# Altium PCB IKIU_UAV.PcbDoc
Units mm, origin at the board's own origin, x right, y up, seen from the top; angles counter-clockwise.
Board outline 69.98 x 70 mm, 2 copper layers (Top Layer, Bottom Layer); 42 components, 52 nets, 190 pads, 0 vias.
Unrouted connection lines stored in the file: 62.
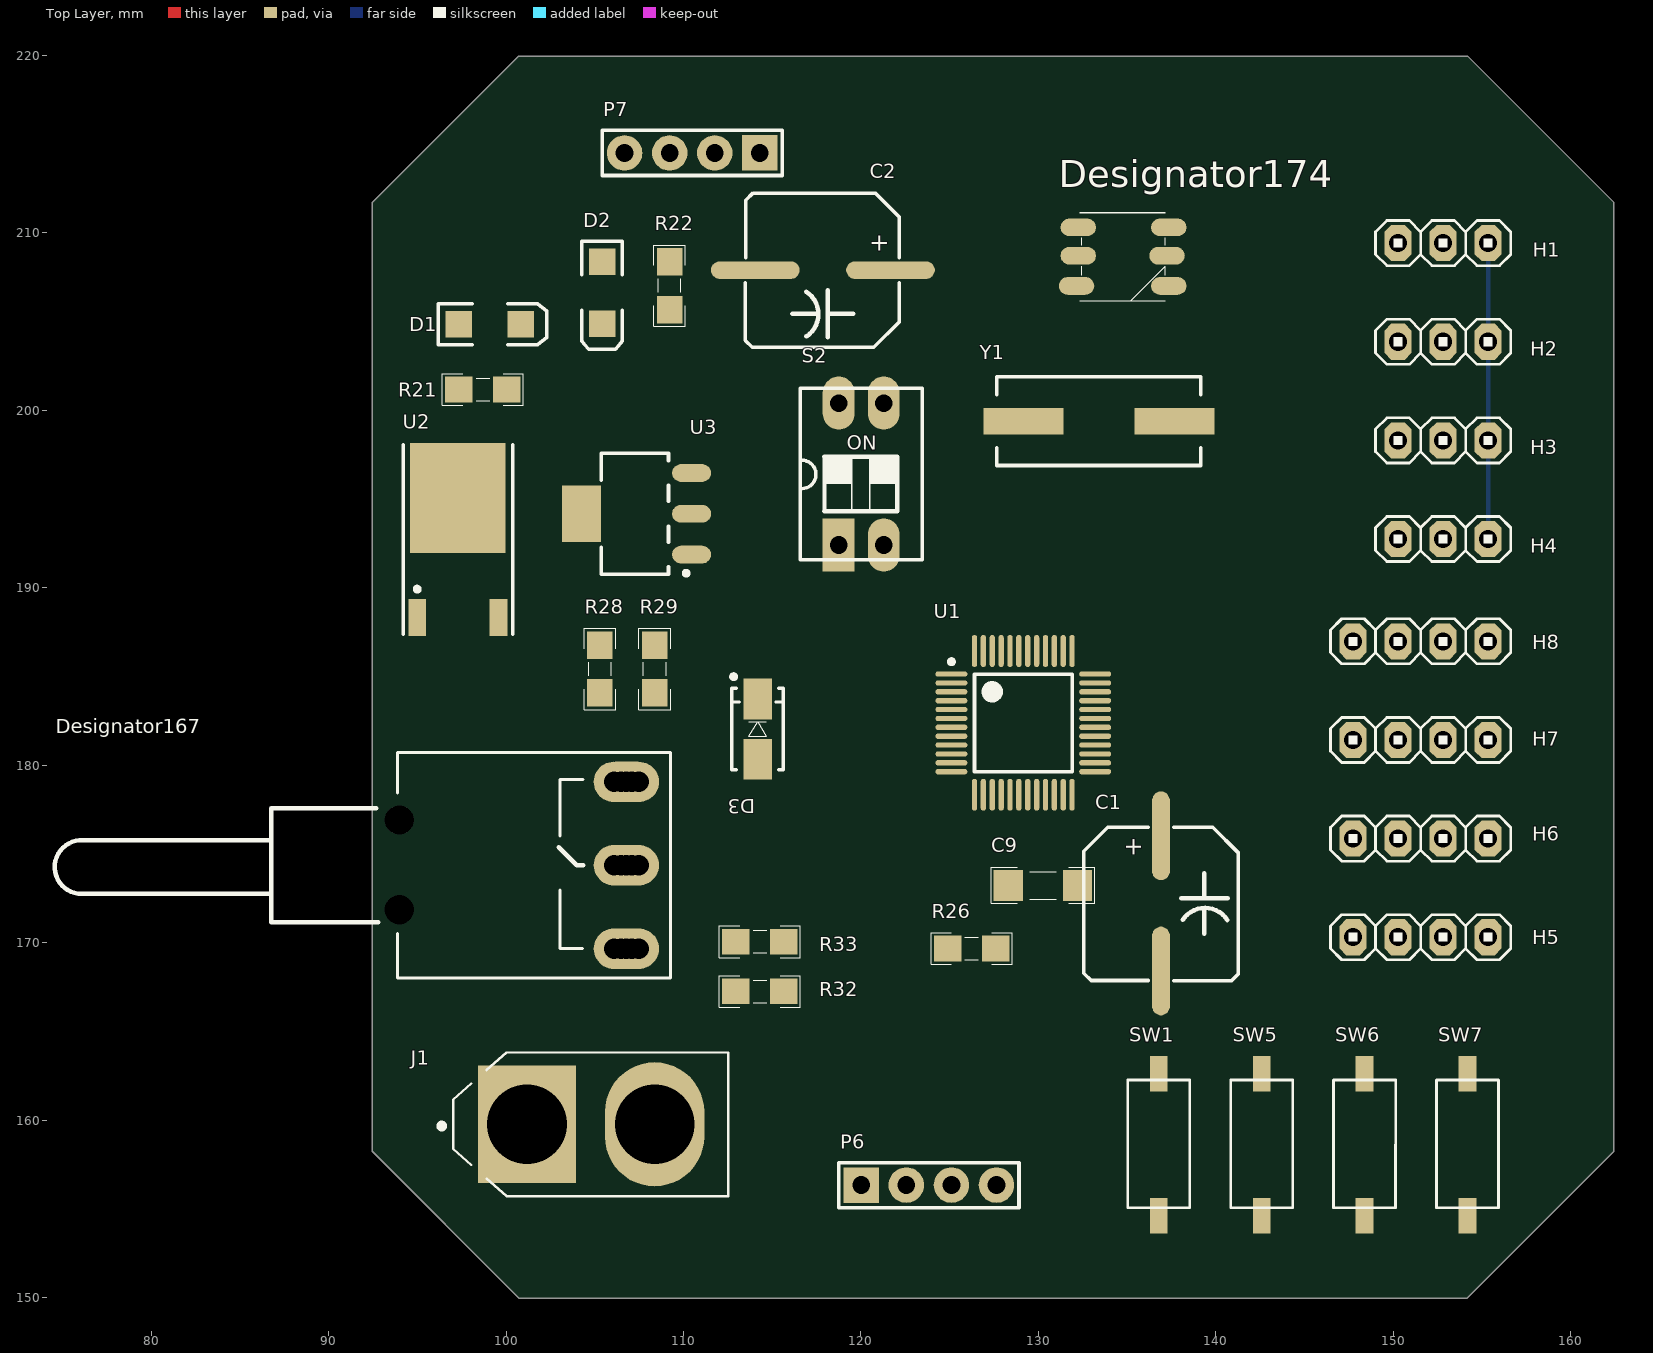
[diagram p0: Top Layer view]
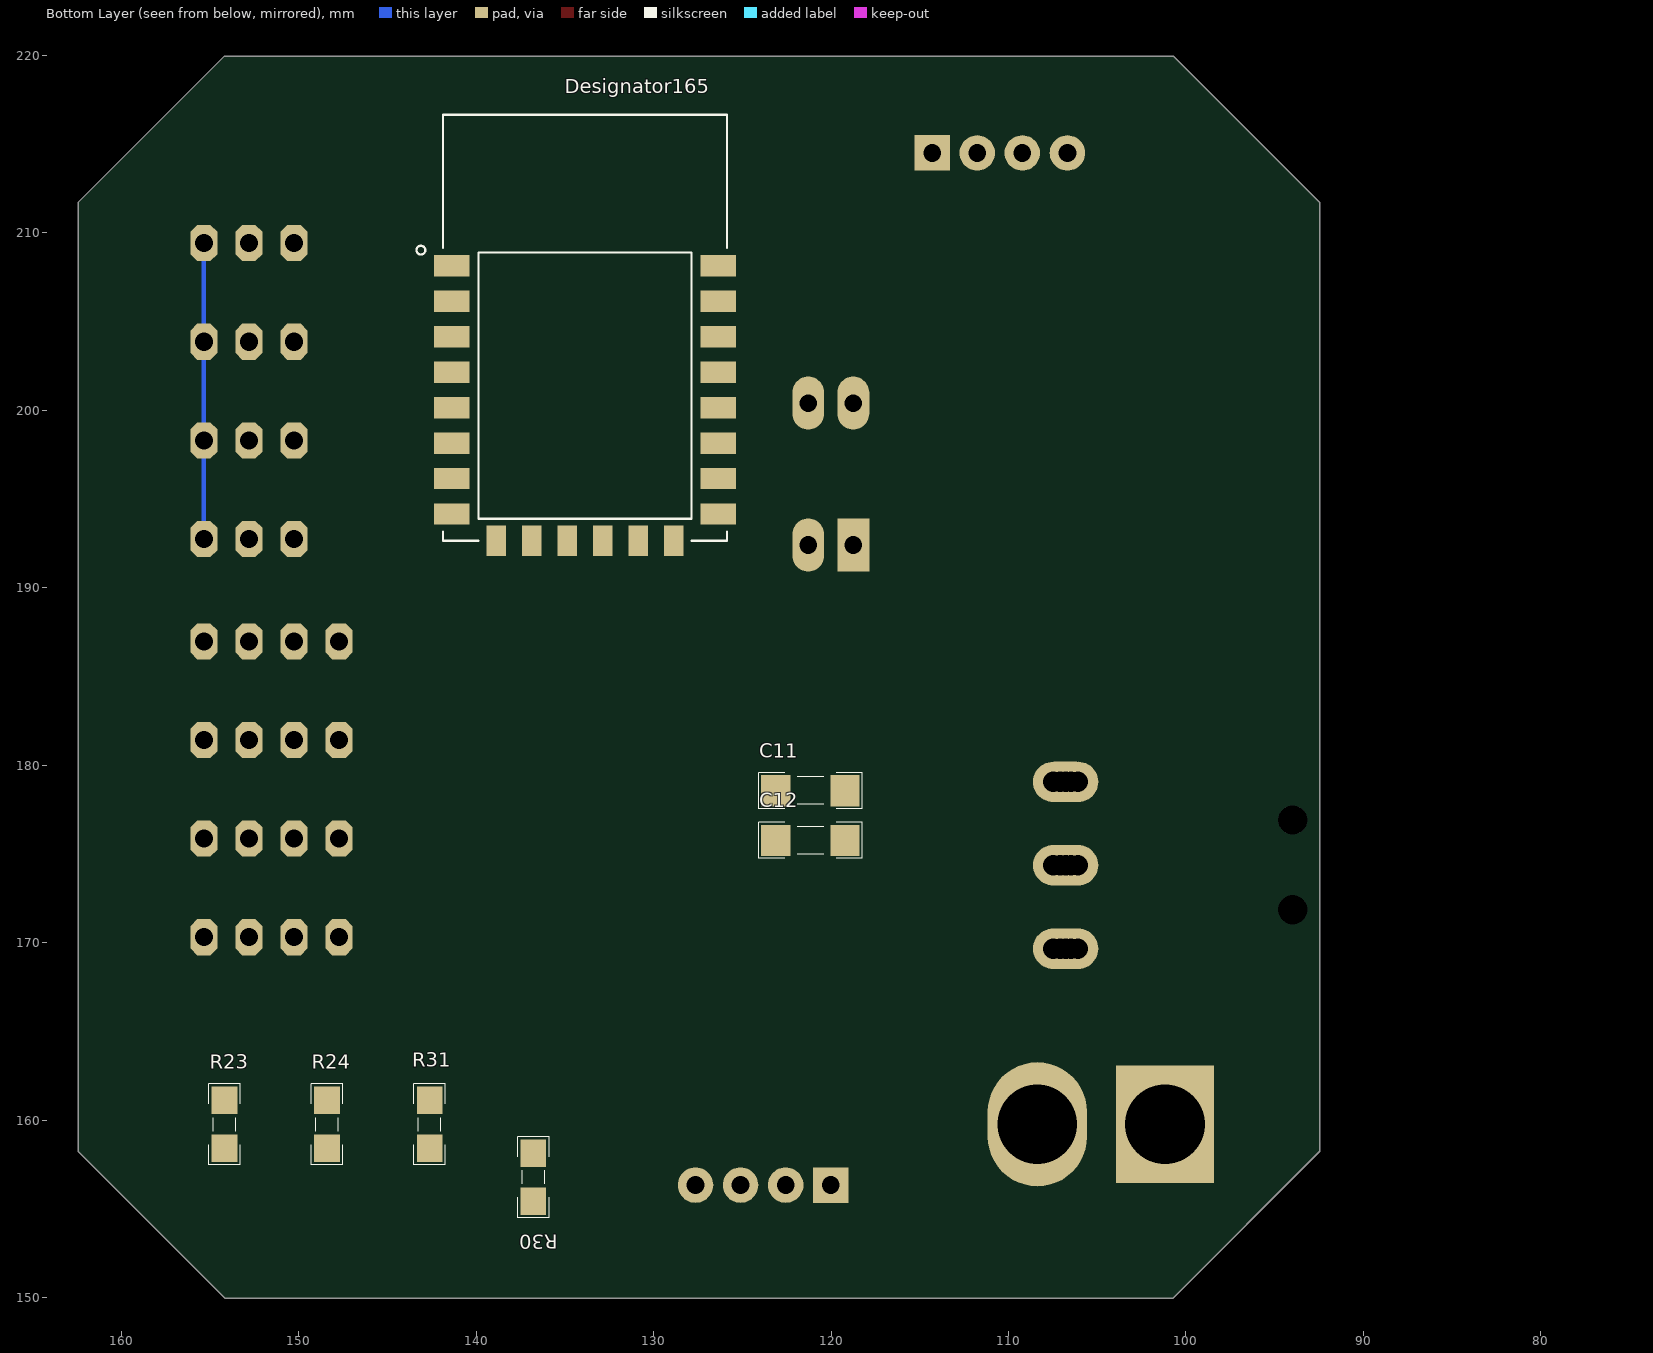
[diagram p1: Bottom Layer view, seen from below]

## Layer stack, top to bottom
Top Solder: solder mask 0.0102, Solder Resist, Dk 3.5
Top Layer: signal copper 0.0356
Dielectric 1: dielectric 0.32, FR-4, Dk 4.8
Bottom Layer: signal copper 0.0356
Bottom Solder: solder mask 0.0102, Solder Resist, Dk 3.5

## Board outline
92.456,158.242 92.456,211.709 100.711,219.964 154.178,219.964 162.433,211.709 162.433,158.242 154.155,149.964 100.734,149.964

## Design rules (kind name [scope] priority, off if disabled: settings)
Clearance [All] p1: gap=0.2 ignorepadtopadclearanceinfootprint=FALSE
PolygonConnect [All] p1: connectstyle=Relief reliefconductorwidth=0.254 reliefentries=4 polygonreliefangle="90 Angle" airgapwidth=0.254
RoutingVias [All] p1: holewidth=0.711 width=1.27 viastyle="Through Hole" minholewidth=0.711 minwidth=1.27 maxholewidth=0.711 maxwidth=1.27
SolderMaskExpansion [All] p1: expansion=0.102 istentingtop=FALSE
Width [All] p1: maxlimit=0.254 minlimit=0.254 preferedwidth=0.254
30 further rules are at their usual default settings.

## Components (designator, comment, footprint, x,y, rotation, side; value= is the part's Value field where it differs from the comment)
C1 "Comment" "CAP SMD 470uF" 136.906,172.212 r90 top
C2 "Comment" "CAP SMD 470uF" 117.856,207.899 r0 top
C9 "0.1uF" CAPC4817X12N 130.257,173.228 r180 top
C11 "0.1uF" CAPC4817X12N 121.158,178.562 r180 bottom
C12 "0.1uF" CAPC4817X12N 121.158,175.768 r180 bottom
D1 "SMD 1206 LED" "LED 1206" 99.088,204.851 r0 top
D2 "SMD 1206 LED" "LED 1206" 105.41,206.629 r270 top
D3 "1n4007" DIOM4629X24N 114.173,182.04 r90 top
Designator165 "Comment" XCVR_ESP8266-12E/ESP-12E 133.865,201.152 r180 bottom
Designator167 "Comment" "Switch SPDT - 500x270x1100x185 mil - Right Angle" 106.78,174.362 r180 top
Designator174 "Comment" "5050 LED package" 134.747,208.661 r0 top
H1 "Comment" My_1X03 152.808,209.423 r0 top
H2 "Comment" My_1X03 152.808,203.864 r0 top
H3 "Comment" My_1X03 152.808,198.305 r0 top
H4 "Comment" My_1X03 152.808,192.746 r0 top
H5 "Comment" My_1X04 151.538,170.307 r0 top
H6 "Comment" My_1X04 151.538,175.866 r0 top
H7 "Comment" My_1X04 151.538,181.425 r0 top
H8 "Comment" My_1X04 151.538,186.984 r0 top
J1 "XT60-M" *AMASS_XT60-M 104.775,159.766 r0 top
P6 "Header 4" HDR1X4 120.017,156.337 r0 top
P7 "Header 4" HDR1X4 114.3,214.503 r180 top
R21 "1K" RESC3413X04N 98.688,201.168 r180 top
R22 "1K" RESC3413X04N 109.22,207.029 r270 top
R23 "1K" RESC3413X04N 154.178,159.766 r90 bottom
R24 "1K" RESC3413X04N 148.399,159.766 r90 bottom
R26 "1K" RESC3413X04N 126.238,169.672 r0 top
R28 "1K" RESC3413X04N 105.283,185.42 r90 top
R29 "1K" RESC3413X04N 108.378,185.42 r270 top
R30 "1K" RESC3413X04N 136.779,156.788 r90 bottom
R31 "1K" RESC3413X04N 142.621,159.766 r270 bottom
R32 "1K" RESC3413X04N 114.3,167.259 r180 top
R33 "1K" RESC3413X04N 114.3,170.053 r0 top
S2 "DS2" "DIP Switch x2" 118.745,192.405 r0 top
SW1 "Comment" PUSH_SMD_2PIN 136.779,158.623 r90 top
SW5 "Comment" PUSH_SMD_2PIN 142.579,158.623 r90 top
SW6 "Comment" PUSH_SMD_2PIN 148.378,158.623 r90 top
SW7 "Comment" PUSH_SMD_2PIN 154.178,158.623 r90 top
U1 "Comment" STM-LQFP48_N 129.147,182.386 r0 top
U2 "Comment" TO-252 97.282,191.697 r0 top
U3 "3V3" SOT223 107.255,194.169 r180 top (schematic designator UP1)
Y1 "12 MHz" "Crystal SMD" 133.409,199.39 r180 top

## Footprints (in the part's own frame and the unit in brackets; to place one, negate y for a bottom-side part, rotate by r counter-clockwise, add the part's x,y. Pads: shape width x height; smd on the part's side, far side on the other; paste and mask are expansions set on the pad)
"5050 LED package" [mm] "DESIGNER ABBAS BASEREH"
  oval 2x1 smd: 1(2.6,-1.65) 2(2.5,0.05) 3(2.6,1.65) 4(-2.5,1.65) 5(-2.5,0.05) 6(-2.6,-1.65)
  silkscreen extent -2.41,-2.49 2.4,2.51, body extent -2.75,-2.5 2.75,2.5, height 1.55
*AMASS_XT60-M [mm]
  rect 5.516x6.6 hole 4.5: 1(-3.6,0)
  oval 5.6x7 hole 4.5: 2(3.6,0)
  silkscreen extent -8.55,-4.05 7.75,4.05
"CAP SMD 470uF" [mm] "SMD CAP 470uF"
  oval 5x1 smd: 1(3.81,0) 2(-3.81,0)
  silkscreen extent -4.37,-4.34 4.29,4.34, body extent -4.53,-4.15 4.47,4.15, height 12
CAPC4817X12N [mm] "Chip Capacitor, 2-Leads, Body 4/80x1/70mm, IPC Medium Density-Design:Abbas Basereh"
  rect 1.65x1.75 smd: 1(-1.95,0) 2(1.95,0)
  silkscreen extent -2.92,-1.02 2.92,1.02, body extent -1.6,-0.8 1.6,0.8, height 1
"Crystal SMD" [mm] "DESIGNER ABBAS BASEREH"
  rect 4.5x1.5 smd: 1(-4.25,0) 2(4.25,0)
  silkscreen extent -5.75,-2.5 5.75,2.5, body extent -6.21,-2.25 6.09,2.25, height 5.18
DIOM4629X24N [mm] "Molded Diode, 2-Leads, Body 4/60x2/90mm, IPC Medium Density-Design:Abbas Basereh"
  rect 2.3x1.6 smd: 1(-1.7,0) 2(1.7,0)
  silkscreen extent -2.3,-1.45 3.07,1.47, body extent -2.5,-1.22 2.5,1.48, height 2.2
"DIP Switch x2" [mm] "Switch DIP 2 way flat slide Thru-Hole-Design:Ali Hafizi"
  rect 1.8x3 hole 1: 1(0,0)
  oval 1.8x3 hole 1: 2(2.54,0) 3(2.54,8) 4(0,8)
  silkscreen extent -2.16,-0.82 4.71,8.83, body extent -1.98,-1.03 4.52,8.97, height 6.91
HDR1X4 [mm] "Connector; Header; 4 Position"
  rect 2x2 hole 1: 1(0,0)
  round 2 hole 1: 2(2.54,0) 3(5.08,0) 4(7.62,0)
  silkscreen extent -1.27,-1.27 8.89,1.27, body extent -1.27,-1.28 8.89,1.26, height 8.38
"LED 1206" [mm]
  rect 1.5x1.5 smd: 1(-1.75,0) 2(1.75,0)
  silkscreen extent -2.9,-1.15 3.2,1.15, body extent -1.65,-0.72 1.65,0.73, height 1.36
My_1X03 [mil]
  oct 60x80 hole 40: 1(-100,0) 2(0,0) 3(100,0)
  silkscreen extent -150,-50 150,50, body extent -152,-61 148,54, height 335
My_1X04 [mil]
  oct 60x80 hole 40: 1(-150,0) 2(-50,0) 3(50,0) 4(150,0)
  silkscreen extent -200,-50 200,50, body extent -198,-49 202,51, height 234
PUSH_SMD_2PIN [mm]
  rect 2x1 smd: 1(-4,0) 2(4,0)
  silkscreen extent -3.57,-1.75 3.63,1.75, body extent -3.56,-1.75 3.63,1.75, height 5
RESC3413X04N [mm] "Chip Resistor, 2-Leads, Body 3/40x1/30mm, IPC Medium Density-Design:Abbas Basereh"
  rect 1.55x1.45 smd: 1(-1.35,0) 2(1.35,0)
  silkscreen extent -2.29,-0.89 2.29,0.89, body extent -1.25,-0.62 1.25,0.62, height 0.79
SOT223 [mm] "SOT223, 4-Leads, Body 6.5x3.5mm, Pitch 2.30mm-Designer Abbas Basereh"
  oval 2.2x1 smd: 1(-3.2,2.3) 2(-3.2,0) 3(-3.2,-2.3)
  rect 2.2x3.2 smd: 4(3,0)
  Top Layer pour cut-out: -1.7,3.556 1.7,3.556 1.7,-3.556 -1.7,-3.556
  silkscreen extent -3.03,-3.4 1.9,3.47, body extent -3.5,-3.25 3.5,3.25, height 1.7
STM-LQFP48_N [mm] "QFP, 48-Leads, Body 7x7mm, Pitch 0.5mm, IPC Medium Density"
  oval 1.8x0.3 smd: 1(-4.05,2.75) 2(-4.05,2.25) 3(-4.05,1.75) 4(-4.05,1.25) 5(-4.05,0.75) 6(-4.05,0.25) 7(-4.05,-0.25) 8(-4.05,-0.75) 9(-4.05,-1.25) 10(-4.05,-1.75) 11(-4.05,-2.25) 12(-4.05,-2.75) 25(4.05,-2.75) 26(4.05,-2.25) 27(4.05,-1.75) 28(4.05,-1.25) 29(4.05,-0.75) 30(4.05,-0.25) 31(4.05,0.25) 32(4.05,0.75) 33(4.05,1.25) 34(4.05,1.75) 35(4.05,2.25) 36(4.05,2.75)
  oval 0.3x1.8 smd: 13(-2.75,-4.05) 14(-2.25,-4.05) 15(-1.75,-4.05) 16(-1.25,-4.05) 17(-0.75,-4.05) 18(-0.25,-4.05) 19(0.25,-4.05) 20(0.75,-4.05) 21(1.25,-4.05) 22(1.75,-4.05) 23(2.25,-4.05) 24(2.75,-4.05) 37(2.75,4.05) 38(2.25,4.05) 39(1.75,4.05) 40(1.25,4.05) 41(0.75,4.05) 42(0.25,4.05) 43(-0.25,4.05) 44(-0.75,4.05) 45(-1.25,4.05) 46(-1.75,4.05) 47(-2.25,4.05) 48(-2.75,4.05)
  silkscreen extent -4.17,-2.75 2.75,3.57, body extent -3.5,-3.5 3.5,3.5, height 1.6
"Switch SPDT - 500x270x1100x185 mil - Right Angle" [mil]
  round 90 hole 45: 1(-27.56,-185.04) 1(-11.81,-185.04) 1(11.81,-185.04) 1(27.56,-185.04) 2(-27.56,0) 2(-11.81,0) 2(11.81,0) 2(27.56,0) 3(-27.56,185.04) 3(-11.81,185.04) 3(11.81,185.04) 3(27.56,185.04)
  oval 140x90 hole 45: 1(0,-185) 2(0,0) 3(0,185)
  round 63 hole 65: MH(503.94,-100.36) MH(503.94,98.43)
  silkscreen extent -98,-250 1268,250, body extent -23,-256 1269,256, height 317
TO-252 [mm] "D-PAK/TO-252-AA; 3 Leads (1 Cropped); Body 10.1 (inc. leads) x 6.6 mm (LxW max)"
  rect 1x2.1 smd: 1(-2.285,-3.375) 3(2.285,-3.375)
  rect 5.4x6.2 smd: 4(0,3.375)
  silkscreen extent -3.08,-4.32 3.09,6.38, body extent -3.27,-4.11 3.27,5.83, height 2.39
XCVR_ESP8266-12E/ESP-12E [mm]
  rect 2x1.2 smd: 1(-7.5,7) 2(-7.5,5) 3(-7.5,3) 4(-7.5,1) 5(-7.5,-1) 6(-7.5,-3) 7(-7.5,-5) 8(-7.5,-7) 15(7.5,-7) 16(7.5,-5) 17(7.5,-3) 18(7.5,-1) 19(7.5,1) 20(7.5,3) 21(7.5,5) 22(7.5,7)
  rect 1.1x1.7 smd: 9(-5,-8.5) 10(-3,-8.5) 11(-1,-8.5) 12(1,-8.5) 13(3,-8.5) 14(5,-8.5)
  silkscreen extent -9.5,-8.5 8,15.5, body extent -8,-8.63 8.01,15.38, height 2.65

## Part data
C9 C11 C12: library part "CAP SMD 1206", "CAP 1206", Data=16-12-2016, Desc.="CAP SMD 1206", Designer="Abbas Basereh"
D1 D2: library part "LED SMD 1206"
D3: library part "1n4007 SMD M7", "Standard Rectifiers", Manufacturer="DC COMPONENTS", Data=16-12-2016, Designer="Abbas Basereh", Link=http://www.tme.eu/en/details/m7/smd-universal-diodes/dc-components/, Part. No=M7
J1: "Plug; DC supply; XT60; male; PIN: 2; for cable; soldered; 30A; 500V", Package="Package Analog Devices", Availability=Unavailable, MF=AMASS, MP=XT60-M, Price=None, SnapEDA_Link=https://www.snapeda.com/parts/XT60-M/AMASS/view-part/2883912/?ref=snap
P6 P7: "Header, 4-Pin", LatestRevisionDate=17-Jul-2002, LatestRevisionNote="Re-released for DXP Platform.", Publisher="Altium Limited"
R21 R22 R23 R24 R26 R28 R29 R30 R31 R32 R33: library part "RES 0805 0.125W", "RES 0805", Data=16-12-2016, Desc.="RES SMD 0805", Designer="Abbas Basereh"
S2: library part "DIP Switch 2", "2 BIT DIP Switch"
U3: library part AMS1117-x.x, "x.x Volt, 800mA Low-Dropout Linear Regulator, 4-pin SOT-223", Data=16-12-2016, Designer="Ali Hafizi"
Y1: library part XTAL, "XTAL Crystal", ComponentLink1Description=Datasheet, ComponentLink2Description=Reference, Design Date=2017-1-3, Designer="ABBAS BASEREH", Mounting Technology="Surface Mount\Through-Hole", Status=Unreleased

## Nets (pads, with @x,y where several pads share a name; then routed paths per layer and width w, separated by ;. In a path a pad name is that pad's centre, name@x,y a point inside that pad or via, vN(x,y) a via of type N, cw(c..) or ccw(c..) an arc to the next point about the centre after c; other vN are vias at no path point)
+5: D1.2 U3.3
+12: Designator167.2 J1.2
ADC1: 
ADC4: 
ADC5: 
ADC6: 
ADC7: 
ADC8: 
ADC9: 
BOOT0: R23.2 SW7.2 U1.44
ESP_BOOT: Designator165.18 R31.1 SW5.2
ESP_RST: Designator165.1 R30.1 SW1.2
ESP_RX: Designator165.21 P7.2 S2.3
ESP_TX: Designator165.22 P7.1 S2.4
GND: C9.1 C11.2 C12.2 Designator165.15 H1.3 H2.3 H3.3 H4.3 J1.1 P6.3 P7.3 R21.1 R22.1 R23.1 R29.1 SW5.1 SW6.1 U1.8 U1.23 U1.35 U1.47 U3.1 | length 16.7
  Bottom Layer w0.254: H4.3 H3.3 H2.3 H1.3
I2C_SCL: 
I2C_SDA: 
INA1: 
INA2: 
INA3: 
INA4: 
INB1: 
INB2: 
INB3: 
INB4: 
LED1: 
LED2: 
MOTORS_EN: 
NetD1_1: D1.1 R21.2
NetD2_1: D2.1 R22.2
NetD3_1: D3.1 Designator167.1
NetD5_1: P6.4
NetR26_1: Designator165.3 R26.1
NetR28_1: Designator165.17 R28.1
NetR29_2: Designator165.16 R29.2
NetR32_2: R32.2 S2.1
NetR33_1: R33.1 S2.2
NRST: R24.2 SW6.2 U1.7
OSC_IN: C11.1 U1.5 Y1.2
OSC_OUT: C12.1 U1.6 Y1.1
PWM1: H4.1
PWM2: H3.1
PWM3: H2.1
PWM4: H1.1
SWCLK: P6.1 U1.37
SWDIO: P6.2 U1.34
UART1_RX: R32.1 U1.31
UART1_TX: R33.2 U1.30
UART2_RX: U1.13
UART2_TX: U1.12
VBAT: D2.2 D3.2
VCC: C9.2 Designator165.8 P7.4 R24.1 R26.2 R28.2 R30.2 R31.2 SW7.1 U1.9 U1.24 U1.36 U1.48 U3.2
pads on no net: C1.1 C1.2 C2.1 C2.2 Designator165.2 Designator165.4 Designator165.5 Designator165.6 Designator165.7 Designator165.9 Designator165.10 Designator165.11 Designator165.12 Designator165.13 Designator165.14 Designator165.19 Designator165.20 Designator167.3 Designator167.MH Designator174.1 Designator174.2 Designator174.3 Designator174.4 Designator174.5 Designator174.6 H1.2 H2.2 H3.2 H4.2 H5.1 H5.2 H5.3 H5.4 H6.1 H6.2 H6.3 H6.4 H7.1 H7.2 H7.3 H7.4 H8.1 H8.2 H8.3 H8.4 SW1.1 U1.1 U1.2 U1.3 U1.4 U1.10 U1.11 U1.14 U1.15 U1.16 U1.17 U1.18 U1.19 U1.20 U1.21 U1.22 U1.25 U1.26 U1.27 U1.28 U1.29 U1.32 U1.33 U1.38 U1.39 U1.40 U1.41 U1.42 U1.43 U1.45 U1.46 U2.1 U2.3 U2.4 U3.4

## Silkscreen, mask and mechanical layers (free items; w line width, h text height)
Mechanical 1:
  the board outline again, w0.5

## Text inside footprints (layer, text, board x,y; h text height)
C1: Top Overlay "+" at 135.806,174.812 h1 r90
C2: Top Overlay "+" at 120.456,208.999 h1
S2: Top Overlay "ON" at 119.185,197.765 h0.8